# EAGLE board buzzer (EAGLE 9.7.0)
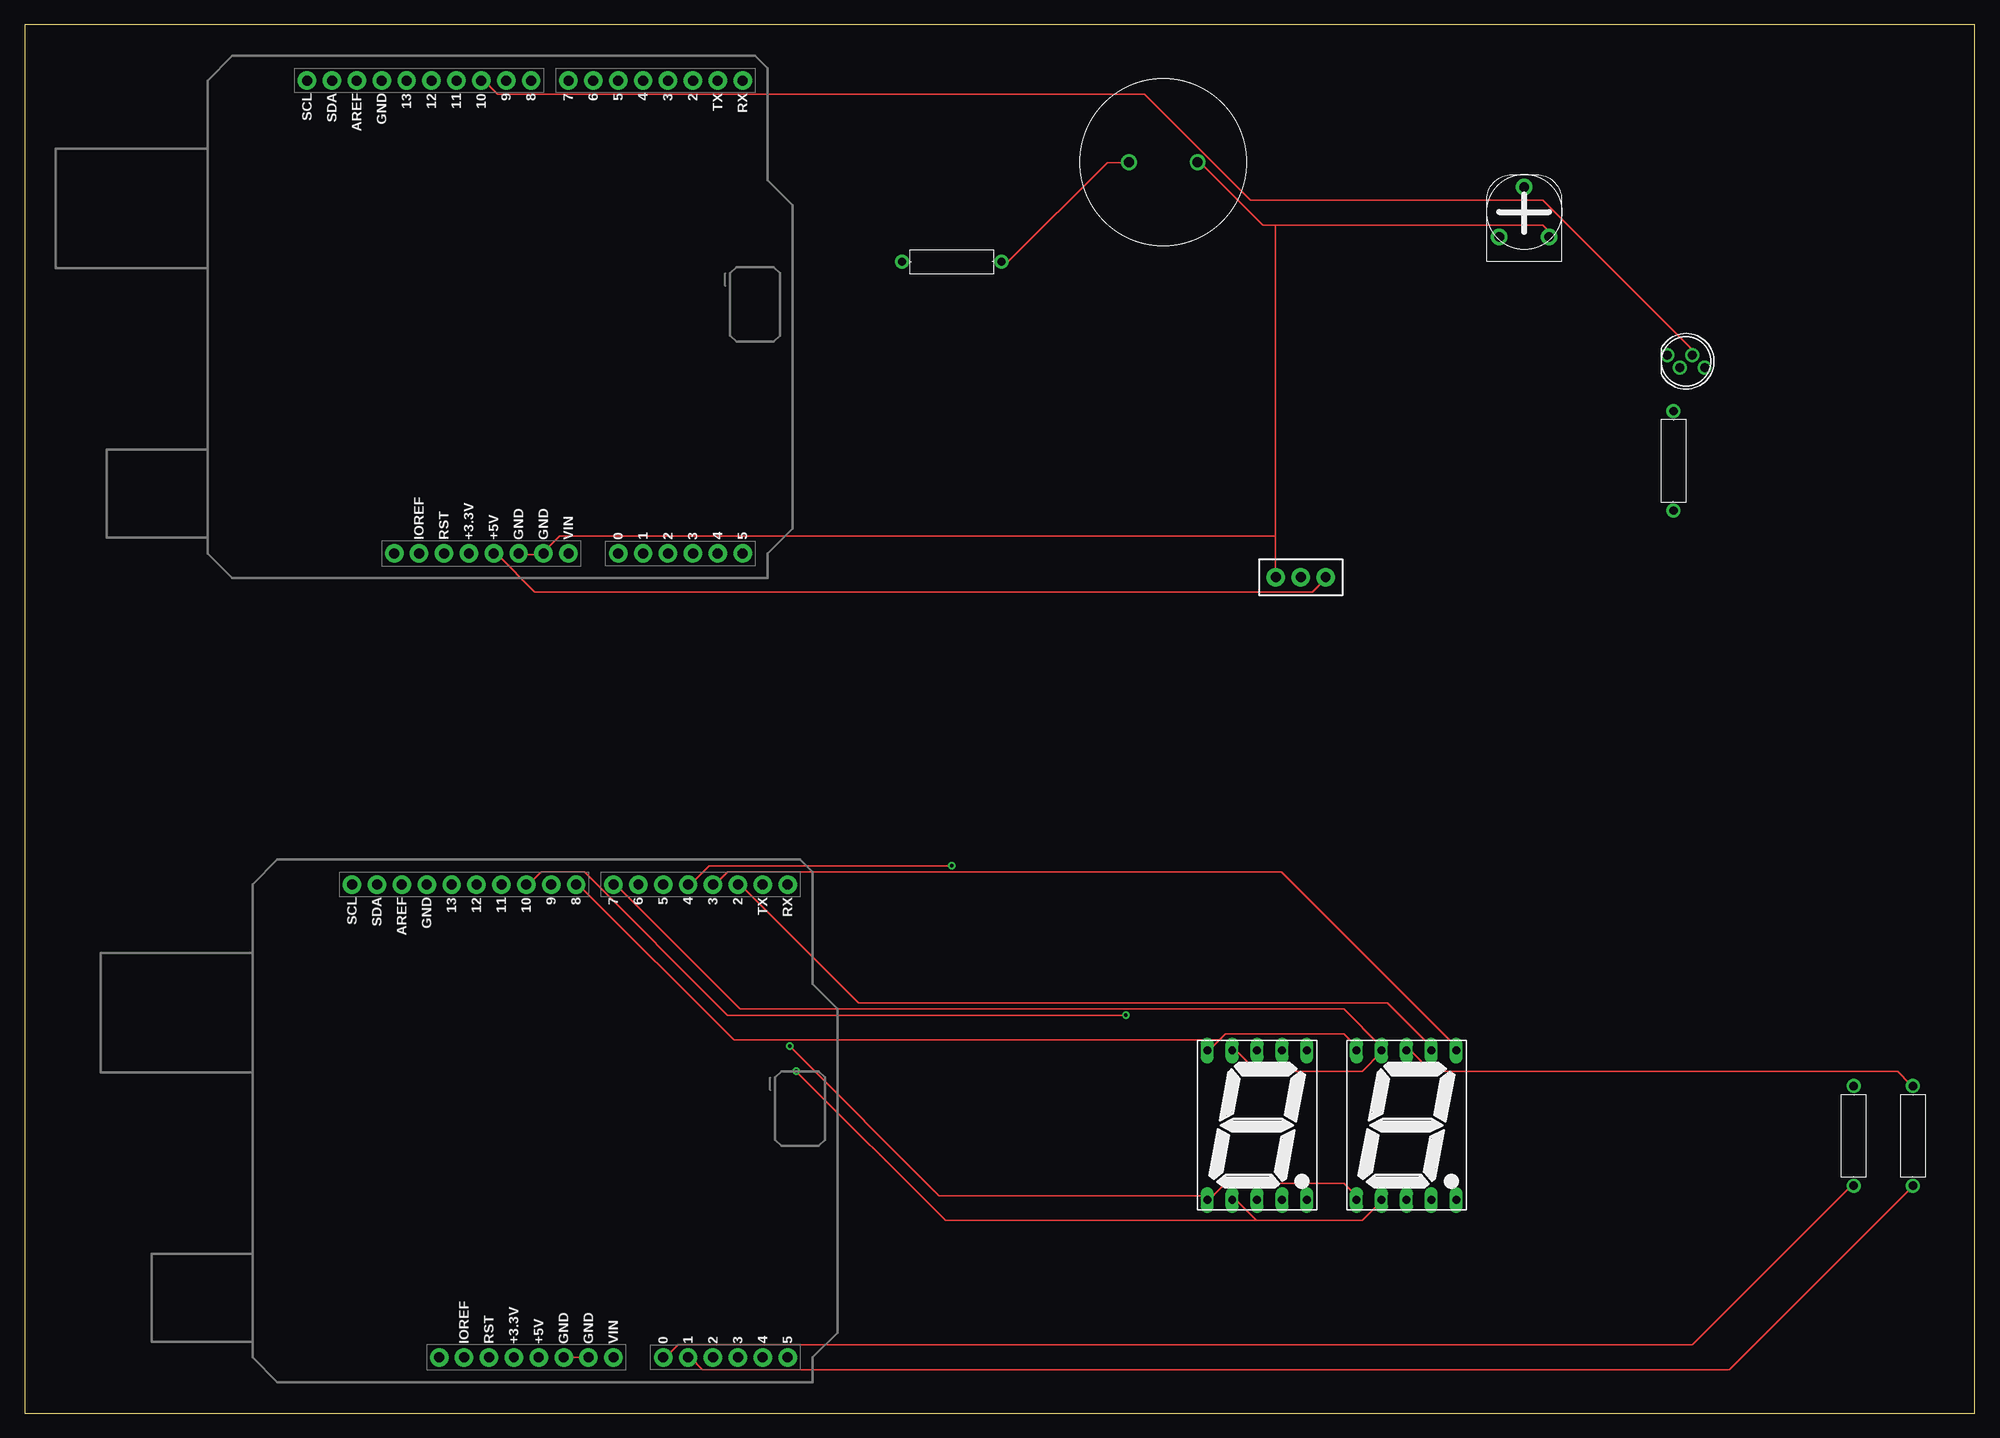
[diagram p0: board, top side]
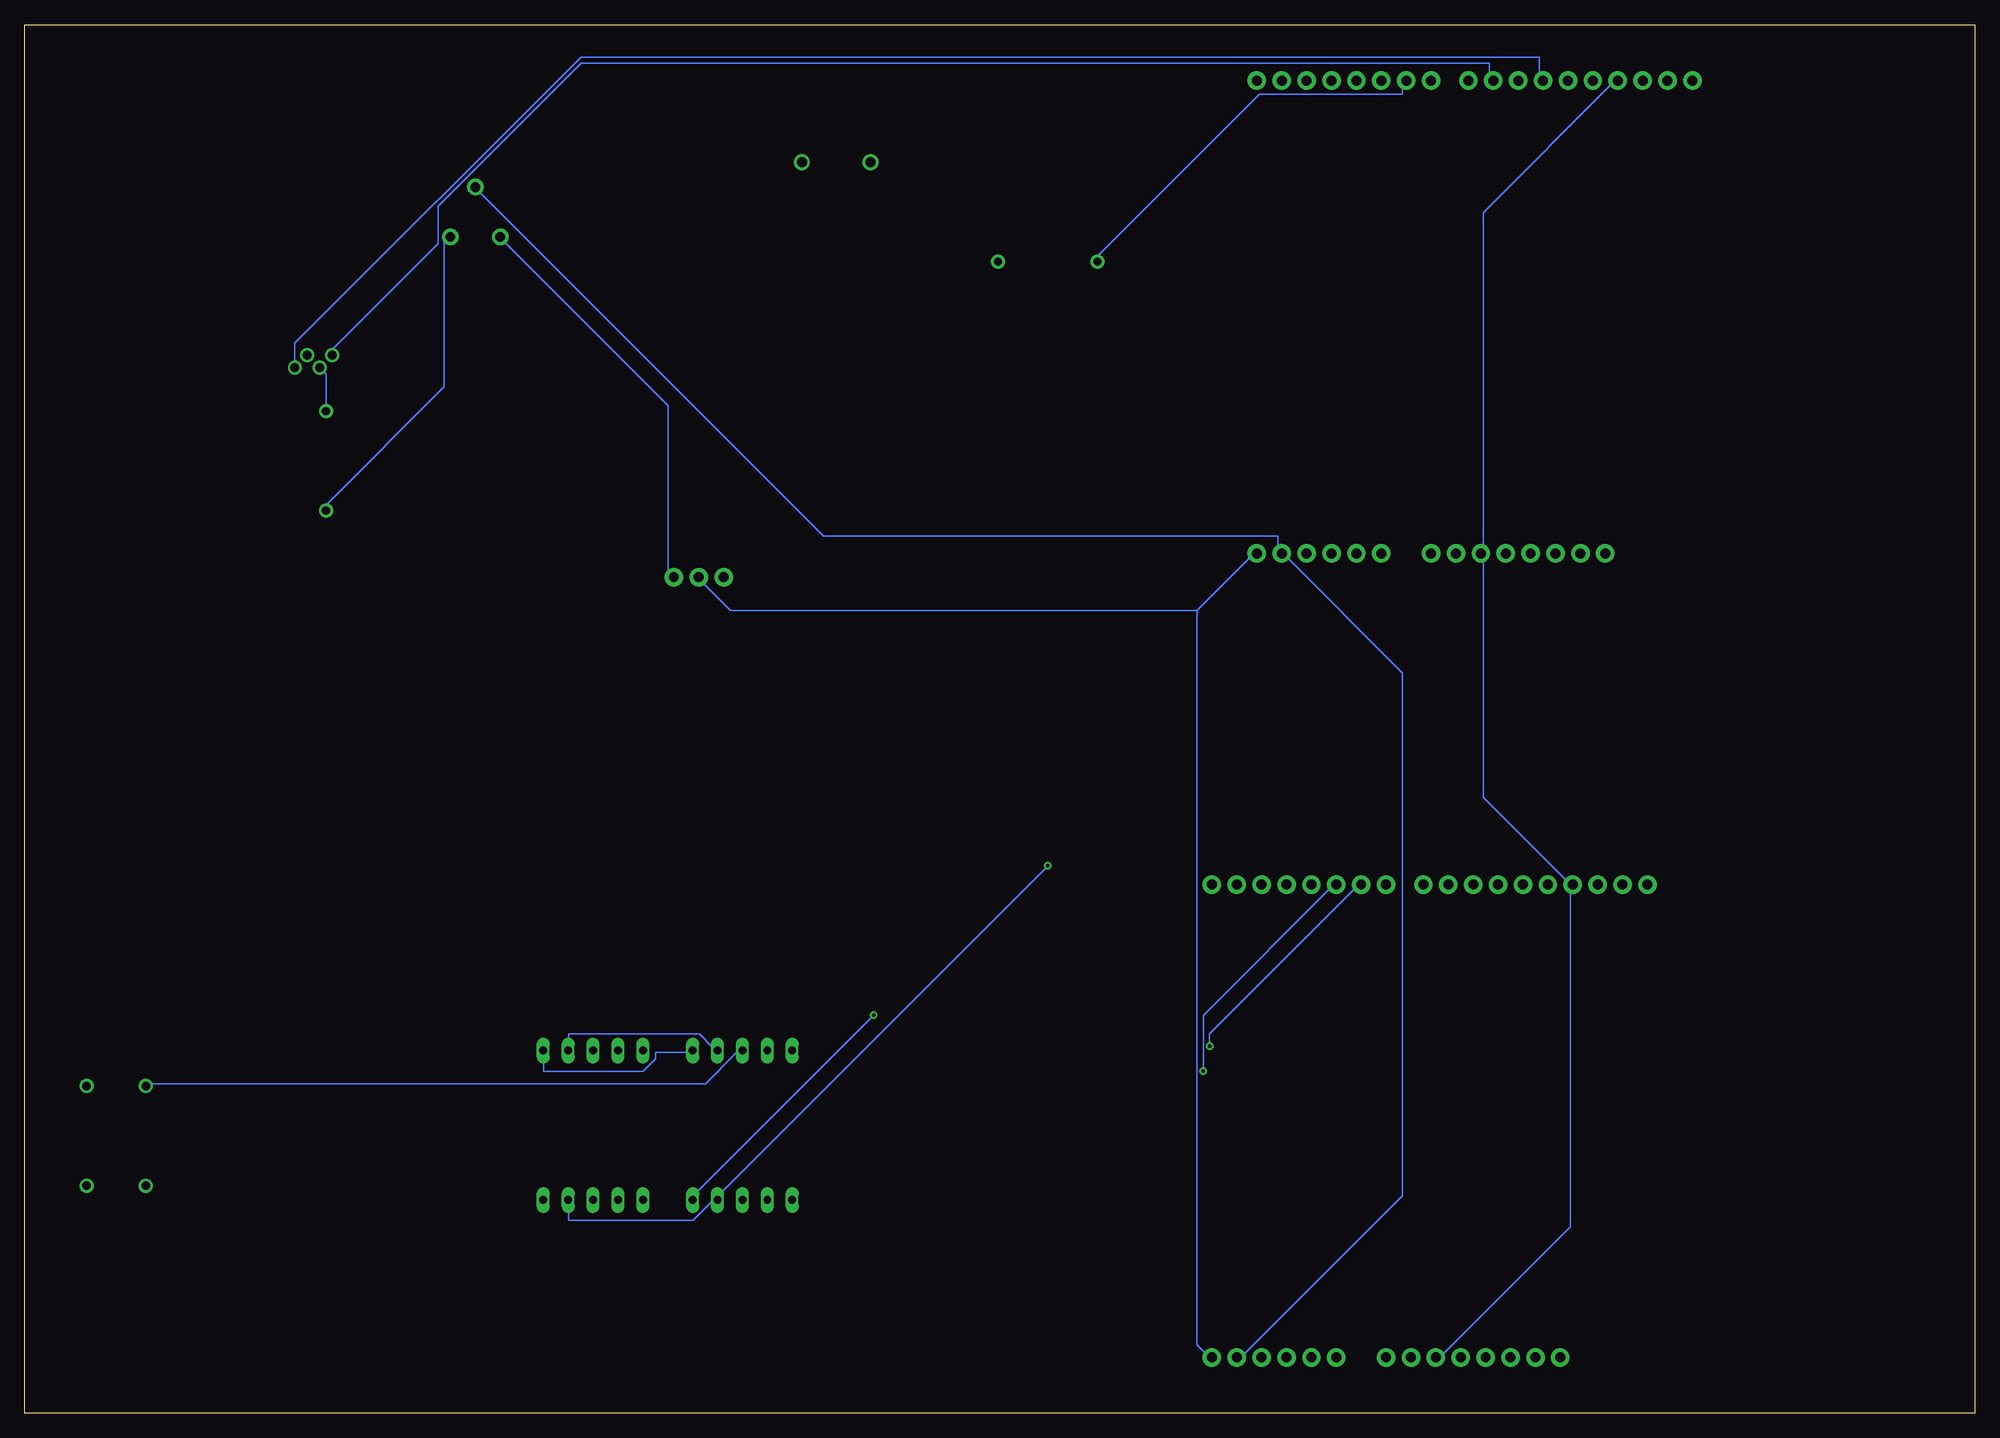
[diagram p1: board, bottom side, seen from below]

Size 199.04 x 141.75 mm. Coordinates in mm from the lower left corner, seen from the top.
Outline: 0,0 199.04,0 199.04,141.75 0,141.75 0,0
Copper layers (1*16): Top 0.035mm / dielectric 1.5mm / Bottom 0.035mm
Design rules "default": minimum track width 6mil, minimum drill 0.35mm, track to track 6mil, track to pad 6mil, pad to pad 6mil, via to via 6mil, smd to smd 6mil, copper to edge 40mil, drill to drill 6mil, minimum pad ring 10mil, minimum via ring 8mil, stop-mask expansion 4mil, vias tented up to drill 0mil, thermal gap 10mil

## Footprints (pad centres in the part's own frame; a part is rotated, then mirrored left to right if it is on the bottom)
LED-RGB-5MM = drill 0.9: B 0.635,0.635; C -0.635,-0.635; G 1.905,-0.635; R -1.905,0.635
7SEG-13 = drill 0.813 long: 1 -5.08,-7.62; 2 -2.54,-7.62; 3 0,-7.62; 4 2.54,-7.62; 5 5.08,-7.62; 6 5.08,7.62; 7 2.54,7.62; 8 0,7.62; 9 -2.54,7.62; 10 -5.08,7.62
PIEZO = drill 1 pad 1.6: 1 -3.5,0; 2 3.5,0
RESAD1016W63L850D250B = drill 0.83 pad 1.43: 1 -5.08,0; 2 5.08,0
HA-06-SM065 = drill 1 pad 1.676: 1 -2.54,-2.54; 2 0,2.54; 3 2.54,-2.54
SWITCH-SPDT-PTH-8.5X3.7MM = drill 1.016 pad 1.88: 1 -2.54,0; 2 0,0; 3 2.54,0
ARDUINO-UNO-R3-SHIELD = drill 1.016 pad 1.88: 3.3V 24.13,-2.54; 5V 24.13,0; A0 24.13,12.7; A1 24.13,15.24; A2 24.13,17.78; A3 24.13,20.32; A4 24.13,22.86; A5 24.13,25.4; AREF -24.13,-13.97; D2 -24.13,20.32; D3 -24.13,17.78; D4 -24.13,15.24; D5 -24.13,12.7; D6 -24.13,10.16; D7 -24.13,7.62; D8 -24.13,3.81; D9 -24.13,1.27; D10 -24.13,-1.27; D11 -24.13,-3.81; D12 -24.13,-6.35; D13 -24.13,-8.89; GND@0 24.13,2.54; GND@1 24.13,5.08; GND@2 -24.13,-11.43; IOREF 24.13,-7.62; NC 24.13,-10.16; RES 24.13,-5.08; RX -24.13,25.4; SCL -24.13,-19.05; SDA -24.13,-16.51; TX -24.13,22.86; VIN 24.13,7.62

## Placement (x,y rotation side)
D5  LED-RGBRCBG-PTH  [LED-RGB-5MM]  169.55,107.38 0 top
DIGIT3  7SEG-CA  [7SEG-13]  125.78,29.41 0 top
DIGIT4  7SEG-CA  [7SEG-13]  141.02,29.41 0 top
PIEZO1  PIEZO  [PIEZO]  116.21,127.7 0 top
R1  1k  [RESAD1016W63L850D250B]  94.62,117.54 0 top
R2  10  [RESAD1016W63L850D250B]  186.65,28.33 90 top
R3  10  [RESAD1016W63L850D250B]  192.71,28.33 90 top
R6  480  [RESAD1016W63L850D250B]  168.28,97.22 90 top
RPOT1  250k  [HA-06-SM065]  153.04,122.62 0 top
S1  TOGGLE  [SWITCH-SPDT-PTH-8.5X3.7MM]  130.24,85.34 180 top
U1  ARDUINO-UNO-R3-SHIELD  [ARDUINO-UNO-R3-SHIELD]  47.88,111.9 270 top
U2  ARDUINO-UNO-R3-SHIELD  [ARDUINO-UNO-R3-SHIELD]  52.48,29.84 270 top

## Library data of the parts
D5 PIEZO1 R1-R3 R6 RPOT1 S1 U1 U2 = Tinkercad
DIGIT3 DIGIT4 = Tinkercad; CATEGORY: Opto-Electronic; SUB-CATEGORY: Display; TYPE: 7-Segment

## Nets
D5_C: D5.C R6.2
DIGIT3_CA2: DIGIT3.8 R2.2
DIGIT4_CA2: DIGIT4.8 R3.2
PIEZO1_1: PIEZO1.1 R1.2
U1_5V: RPOT1.1 S1.1 U1.5V
U1_A4: RPOT1.2 U1.A4 U2.A4
U1_A5: S1.2 U1.A5 U2.A5
U1_D6: R1.1 U1.D6
U1_D9: D5.R U1.D9
U1_D10: D5.B U1.D10
U1_D11: D5.G U1.D11
U1_GND: PIEZO1.2 R6.1 RPOT1.3 S1.3 U1.GND@0 U1.GND@1 U1.GND@2 U2.GND@0 U2.GND@1 U2.GND@2
U2_A0: R2.1 U2.A0
U2_A1: R3.1 U2.A1
U2_D2: DIGIT3.7 DIGIT4.7 U2.D2
U2_D3: DIGIT3.6 DIGIT4.6 U2.D3
U2_D4: DIGIT3.4 DIGIT4.4 U2.D4
U2_D5: DIGIT3.2 DIGIT4.2 U2.D5
U2_D6: DIGIT3.1 DIGIT4.1 U2.D6
U2_D7: DIGIT3.9 DIGIT4.9 U2.D7
U2_D8: DIGIT3.10 DIGIT4.10 U2.D8
U2_D10: DIGIT3.5 U2.D10

## Tracks (layer width: path | path; a pad name or v marks a point on that pad's centre or on a via)
D5_C
  Bottom 0.152: D5.C 168.91,106.68 168.28,106.05 168.28,102.87 R6.2
DIGIT3_CA2
  Bottom 0.152: DIGIT3.8 126.36,36.83 129.54,33.66 186.06,33.66 R2.2
DIGIT4_CA2
  Top 0.152: DIGIT4.8 141.6,36.83 143.51,34.92 191.13,34.92 192.41,33.66 R3.2
PIEZO1_1
  Top 0.152: R1.2 100.33,117.47 110.49,127.64 112.39,127.64 PIEZO1.1
U1_5V
  Top 0.152: U1.5V 48.26,87.63 52.07,83.82 131.44,83.82 132.72,85.09 S1.1
  Bottom 0.152: RPOT1.1 150.5,120.02 133.35,102.87 133.35,85.72 S1.1
U1_A4
  Bottom 0.152: RPOT1.2 153.03,125.09 117.47,89.53 71.12,89.53 71.12,88.27 U1.A4 70.48,87.63 58.42,75.56 58.42,22.23 74.93,5.71 U2.A4
U1_A5
  Bottom 0.152: 79.38,81.92 79.38,6.99 78.11,5.71 U2.A5 | 79.38,81.92 73.66,87.63 U1.A5 | 79.38,81.92 127,81.92 130.18,85.09 S1.2
U1_D6
  Bottom 0.152: R1.1 89.53,118.11 73.03,134.62 58.42,134.62 58.42,135.89 U1.D6
U1_D9
  Bottom 0.152: D5.R 167.64,108.58 156.84,119.38 156.84,123.19 142.24,137.79 49.53,137.79 49.53,136.53 U1.D9
U1_D10
  Top 0.152: D5.B 170.18,108.58 154.94,123.83 125.09,123.83 114.3,134.62 48.26,134.62 46.99,135.89 U1.D10
U1_D11
  Bottom 0.152: D5.G 171.45,107.31 171.45,109.22 142.24,138.43 44.45,138.43 44.45,136.53 U1.D11
U1_GND
  Top 0.152: 127.64,121.28 154.94,121.28 155.57,120.65 RPOT1.3 | 127.64,121.28 126.36,121.28 120.02,127.64 PIEZO1.2 | 127.64,121.28 127.64,89.53 | 127.64,89.53 127.64,85.72 S1.3 | U2.GND@1 U2.GND@0 | U1.GND@0 50.8,87.63 52.7,87.63 U1.GND@1 53.34,88.27 54.61,89.53 127.64,89.53
  Bottom 0.152: R6.1 168.28,92.71 156.21,104.78 156.21,120.02 RPOT1.3 | U1.GND@2 36.83,135.89 50.16,122.56 50.16,88.27 U1.GND@0 50.16,87.63 50.16,62.87 41.27,53.98 | 41.27,53.98 41.27,19.05 54.61,5.71 U2.GND@0 | 41.27,53.98 U2.GND@2
U2_A0
  Top 0.152: R2.1 186.06,22.86 170.18,6.99 66.67,6.99 65.41,5.71 U2.A0
U2_A1
  Top 0.152: R3.1 192.41,22.86 173.99,4.45 69.22,4.45 67.94,5.71 U2.A1
U2_D2
  Top 0.152: U2.D2 73.03,53.98 85.09,41.91 139.06,41.91 143.51,37.47 DIGIT4.7
  Bottom 0.152: DIGIT3.7 128.91,37.47 130.18,38.73 143.51,38.73 143.51,37.47 DIGIT4.7
U2_D3
  Top 0.152: U2.D3 70.48,53.98 71.75,55.24 128.27,55.24 146.05,37.47 DIGIT4.6
  Bottom 0.152: DIGIT3.6 131.44,36.83 134.62,36.83 134.62,36.2 135.89,34.92 146.05,34.92 146.05,36.83 DIGIT4.6
U2_D4  (via drill 0.35)
  Top 0.152: v94.61,55.88 69.85,55.88 67.94,53.98 U2.D4
  Bottom 0.152: DIGIT4.4 143.51,21.59 143.51,19.68 130.81,19.68 128.91,21.59 DIGIT3.4 128.27,22.23 v94.61,55.88
U2_D5  (via drill 0.35)
  Top 0.152: 125.73,19.68 123.83,21.59 DIGIT3.2 | 125.73,19.68 136.53,19.68 138.43,21.59 DIGIT4.2 | v78.74,34.92 93.98,19.68 125.73,19.68
  Bottom 0.152: v78.74,34.92 78.74,40.64 65.41,53.98 U2.D5
U2_D6  (via drill 0.35)
  Top 0.152: DIGIT4.1 135.89,22.23 134.62,23.5 122.56,23.5 121.28,22.23 DIGIT3.1 120.65,22.23 93.34,22.23 v78.11,37.47
  Bottom 0.152: v78.11,37.47 78.11,38.73 62.87,53.98 U2.D6
U2_D7
  Top 0.152: DIGIT3.9 123.83,36.83 125.73,34.92 136.53,34.92 138.43,36.83 DIGIT4.9 138.43,37.47 134.62,41.27 73.03,41.27 60.33,53.98 U2.D7
U2_D8
  Top 0.152: 121.92,38.1 122.56,38.73 134.62,38.73 135.89,37.47 DIGIT4.10 | 121.92,38.1 121.28,37.47 DIGIT3.10 | 121.92,38.1 72.39,38.1 56.52,53.98 U2.D8
U2_D10  (via drill 0.35)
  Top 0.152: v112.39,40.64 71.75,40.64 57.15,55.24 52.7,55.24 51.44,53.98 U2.D10
  Bottom 0.152: v112.39,40.64 130.81,22.23 DIGIT3.5